# EAGLE board selector_wheel_2 (EAGLE 7.3.0)
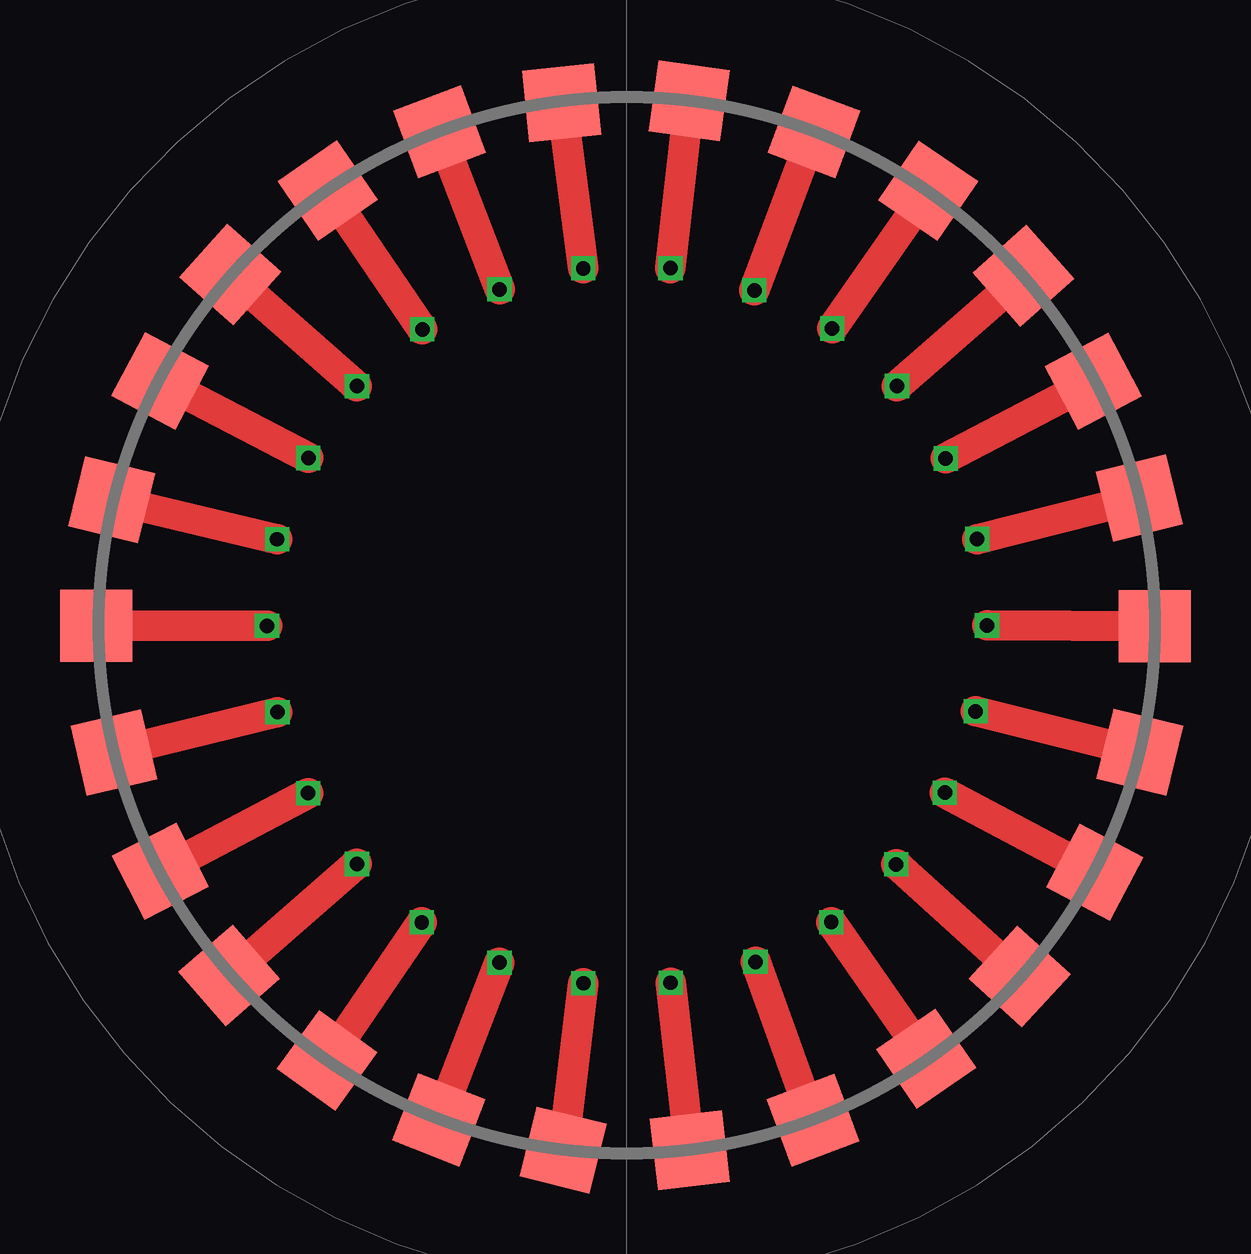
[diagram p0: board, top side]
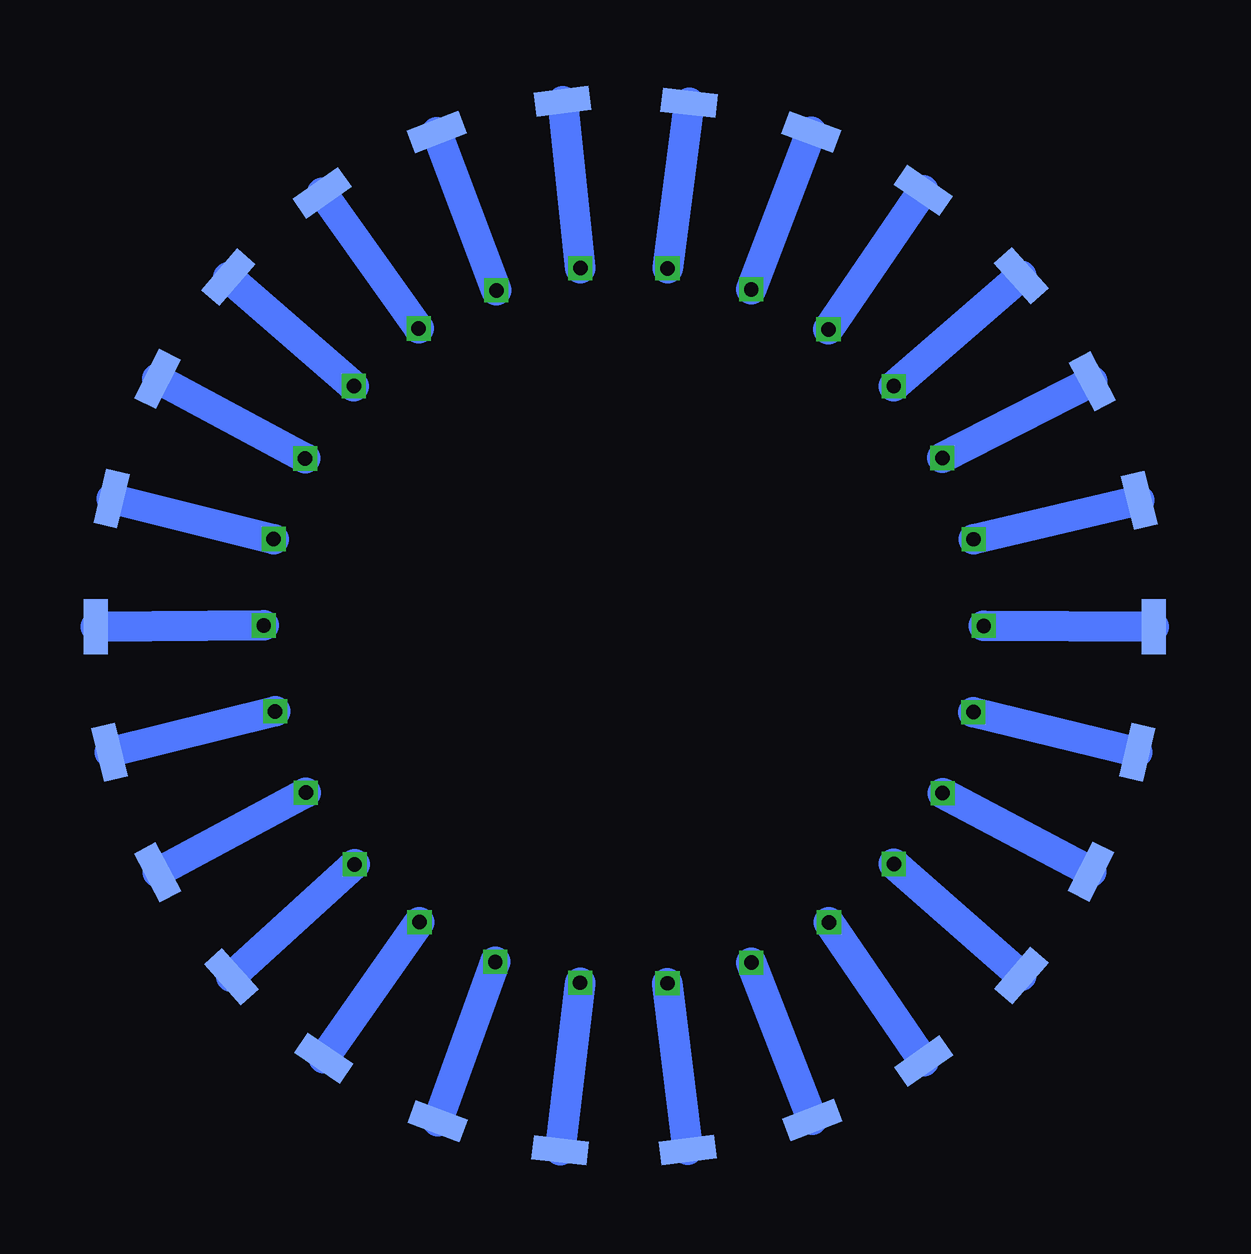
[diagram p1: board, bottom side, seen from below]

No outline drawn. Coordinates in mm, seen from the top.
Copper layers (1*16): Top 0.035mm / dielectric 1.5mm / Bottom 0.035mm
Design rules "default": minimum track width 10mil, minimum drill 24mil, track to track 8mil, track to pad 8mil, pad to pad 8mil, via to via 8mil, smd to smd 8mil, copper to edge 40mil, drill to drill 8mil, minimum pad ring 10mil, minimum via ring 8mil, stop-mask expansion 4mil, vias tented up to drill 0mil, thermal gap 10mil

## Footprints (pad centres in the part's own frame; a part is rotated, then mirrored left to right if it is on the bottom)
CONTACT = smd 3 x 3: P$1 0,0
SPRING = smd 2.3 x 1: P$1 0,0

## Placement (x,y rotation side)
U$1  CONTACT  [CONTACT]  52.01,29.97 0 top
U$2  CONTACT  [CONTACT]  51.36,35.31 103.9 top
U$3  CONTACT  [CONTACT]  49.44,40.18 117.8 top
U$4  CONTACT  [CONTACT]  46.53,44.57 41.7 top
U$5  CONTACT  [CONTACT]  42.56,48.11 145.6 top
U$6  CONTACT  [CONTACT]  37.8,50.56 69.5 top
U$7  CONTACT  [CONTACT]  7.89,29.98 0 top
U$8  CONTACT  [CONTACT]  27.29,51.77 95.9 top
U$9  CONTACT  [CONTACT]  49.51,19.71 332.2 top
U$10  CONTACT  [CONTACT]  51.38,24.71 346.1 top
U$11  CONTACT  [CONTACT]  46.38,15.37 137.6 top
U$12  CONTACT  [CONTACT]  42.48,11.95 304.4 top
U$13  CONTACT  [CONTACT]  32.64,8.13 276.6 top
U$14  CONTACT  [CONTACT]  37.77,9.38 290.5 top
U$15  CONTACT  [CONTACT]  22.17,9.39 248.8 top
U$16  CONTACT  [CONTACT]  27.36,8.14 346.1 top
U$17  CONTACT  [CONTACT]  13.44,15.42 221 top
U$18  CONTACT  [CONTACT]  17.53,11.87 54.2 top
U$19  CONTACT  [CONTACT]  17.54,48.12 304.4 top
U$20  CONTACT  [CONTACT]  22.2,50.57 290.5 top
U$21  CONTACT  [CONTACT]  13.48,44.62 318.3 top
U$22  CONTACT  [CONTACT]  10.56,40.19 332.2 top
U$23  CONTACT  [CONTACT]  8.63,24.71 193.2 top
U$24  CONTACT  [CONTACT]  8.54,35.23 346.1 top
U$25  CONTACT  [CONTACT]  10.57,19.76 207.1 top
U$26  CONTACT  [CONTACT]  32.61,51.86 82 top
U$27  SPRING  [SPRING]  52.02,29.95 90 bottom
U$28  SPRING  [SPRING]  51.36,35.29 256.8 bottom
U$29  SPRING  [SPRING]  49.45,40.27 242.9 bottom
U$30  SPRING  [SPRING]  46.5,44.51 229 bottom
U$31  SPRING  [SPRING]  42.59,48.02 215.1 bottom
U$32  SPRING  [SPRING]  37.81,50.56 201.2 bottom
U$33  SPRING  [SPRING]  7.94,29.94 90 bottom
U$34  SPRING  [SPRING]  27.3,51.77 353.4 bottom
U$35  SPRING  [SPRING]  49.44,19.71 117.8 bottom
U$36  SPRING  [SPRING]  51.45,24.71 103.9 bottom
U$37  SPRING  [SPRING]  46.37,15.36 131.7 bottom
U$38  SPRING  [SPRING]  42.52,11.96 145.6 bottom
U$39  SPRING  [SPRING]  32.67,8.13 173.4 bottom
U$40  SPRING  [SPRING]  37.78,9.34 159.5 bottom
U$41  SPRING  [SPRING]  22.16,9.39 201.2 bottom
U$42  SPRING  [SPRING]  27.35,8.14 187.3 bottom
U$43  SPRING  [SPRING]  13.45,15.41 229 bottom
U$44  SPRING  [SPRING]  17.53,11.85 215.1 bottom
U$45  SPRING  [SPRING]  17.54,48.12 145.6 bottom
U$46  SPRING  [SPRING]  22.21,50.56 159.5 bottom
U$47  SPRING  [SPRING]  13.46,44.57 131.7 bottom
U$48  SPRING  [SPRING]  10.5,40.17 117.8 bottom
U$49  SPRING  [SPRING]  8.62,24.71 256.8 bottom
U$50  SPRING  [SPRING]  8.54,35.22 103.9 bottom
U$51  SPRING  [SPRING]  10.55,19.74 242.9 bottom
U$52  SPRING  [SPRING]  32.57,51.84 187.3 bottom

## Library data of the parts
U$1-U$52 = enigma

## Nets
N$1: U$1.P$1 U$27.P$1
N$2: U$2.P$1 U$28.P$1
N$3: U$3.P$1 U$29.P$1
N$4: U$4.P$1 U$30.P$1
N$5: U$5.P$1 U$31.P$1
N$6: U$6.P$1 U$32.P$1
N$7: U$7.P$1 U$33.P$1
N$8: U$8.P$1 U$34.P$1
N$9: U$9.P$1 U$35.P$1
N$10: U$10.P$1 U$36.P$1
N$11: U$11.P$1 U$37.P$1
N$12: U$12.P$1 U$38.P$1
N$13: U$18.P$1 U$44.P$1
N$14: U$17.P$1 U$43.P$1
N$15: U$16.P$1 U$42.P$1
N$16: U$15.P$1 U$41.P$1
N$17: U$14.P$1 U$40.P$1
N$18: U$13.P$1 U$39.P$1
N$19: U$19.P$1 U$45.P$1
N$20: U$20.P$1 U$46.P$1
N$21: U$21.P$1 U$47.P$1
N$22: U$22.P$1 U$48.P$1
N$23: U$23.P$1 U$49.P$1
N$24: U$24.P$1 U$50.P$1
N$25: U$25.P$1 U$51.P$1
N$26: U$26.P$1 U$52.P$1

## Tracks (layer width: path | path; a pad name or v marks a point on that pad's centre or on a via)
N$1  (via drill 0.6)
  Top 1.27: U$1.P$1 v45.02,30
  Bottom 1.27: v45.02,30 U$27.P$1
N$2  (via drill 0.6)
  Top 1.27: v44.61,33.6 U$2.P$1
  Bottom 1.27: U$28.P$1 v44.61,33.6
N$3  (via drill 0.6)
  Top 1.27: v43.29,36.95 U$3.P$1
  Bottom 1.27: U$29.P$1 v43.29,36.95
N$4  (via drill 0.6)
  Top 1.27: v41.26,39.97 U$4.P$1
  Bottom 1.27: U$30.P$1 v41.26,39.97
N$5  (via drill 0.6)
  Top 1.27: v38.56,42.37 U$5.P$1
  Bottom 1.27: U$31.P$1 v38.56,42.37
N$6  (via drill 0.6)
  Top 1.27: v35.33,43.96 U$6.P$1
  Bottom 1.27: U$32.P$1 v35.33,43.96
N$7  (via drill 0.6)
  Top 1.27: v15.02,29.98 U$7.P$1
  Bottom 1.27: U$33.P$1 v15.02,29.98
N$8  (via drill 0.6)
  Top 1.27: U$8.P$1 v28.2,44.88
  Bottom 1.27: v28.2,44.88 U$34.P$1
N$9  (via drill 0.6)
  Top 1.27: U$9.P$1 v43.26,23.03
  Bottom 1.27: v43.26,23.03 U$35.P$1
N$10  (via drill 0.6)
  Top 1.27: U$10.P$1 v44.54,26.42
  Bottom 1.27: v44.54,26.42 U$36.P$1
N$11  (via drill 0.6)
  Top 1.27: U$11.P$1 v41.23,20.04
  Bottom 1.27: v41.23,20.04 U$37.P$1
N$12  (via drill 0.6)
  Top 1.27: v38.53,17.64 U$12.P$1
  Bottom 1.27: U$38.P$1 v38.53,17.64
N$13  (via drill 0.6)
  Top 1.27: v21.47,17.62 U$18.P$1
  Bottom 1.27: U$44.P$1 v21.47,17.62
N$14  (via drill 0.6)
  Top 1.27: U$17.P$1 v18.77,20.06
  Bottom 1.27: v18.77,20.06 U$43.P$1
N$15  (via drill 0.6)
  Top 1.27: v28.2,15.09 U$16.P$1
  Bottom 1.27: U$42.P$1 v28.2,15.09
N$16  (via drill 0.6)
  Top 1.27: v24.7,15.95 U$15.P$1
  Bottom 1.27: U$41.P$1 v24.7,15.95
N$17  (via drill 0.6)
  Top 1.27: v35.37,15.98 U$14.P$1
  Bottom 1.27: U$40.P$1 v35.37,15.98
N$18  (via drill 0.6)
  Top 1.27: U$13.P$1 v31.83,15.11
  Bottom 1.27: v31.83,15.11 U$39.P$1
N$19  (via drill 0.6)
  Top 1.27: v21.49,42.33 U$19.P$1
  Bottom 1.27: U$19.P$1 v21.49,42.33
N$20  (via drill 0.6)
  Top 1.27: v24.71,44 U$20.P$1
  Bottom 1.27: U$46.P$1 v24.71,44
N$21  (via drill 0.6)
  Top 1.27: U$21.P$1 v18.77,39.97
  Bottom 1.27: v18.77,39.97 U$47.P$1
N$22  (via drill 0.6)
  Top 1.27: U$22.P$1 v16.74,36.98
  Bottom 1.27: v16.74,36.98 U$48.P$1
N$23  (via drill 0.6)
  Top 1.27: U$23.P$1 v15.45,26.39
  Bottom 1.27: v15.45,26.39 U$49.P$1
N$24  (via drill 0.6)
  Top 1.27: v15.44,33.59 U$24.P$1
  Bottom 1.27: U$50.P$1 v15.44,33.59
N$25  (via drill 0.6)
  Top 1.27: U$25.P$1 v16.73,23.01
  Bottom 1.27: v16.73,23.01 U$51.P$1
N$26  (via drill 0.6)
  Top 1.27: v31.83,44.88 U$26.P$1
  Bottom 1.27: U$52.P$1 v31.83,44.88